# Altium PCB PCBdis.PcbDoc
Units mil, origin at the board's own origin, x right, y up, seen from the top; angles counter-clockwise.
Board outline 3600 x 2490 mil, 2 copper layers (Top Layer, Bottom Layer); 21 components, 32 nets, 153 pads, 28 vias.
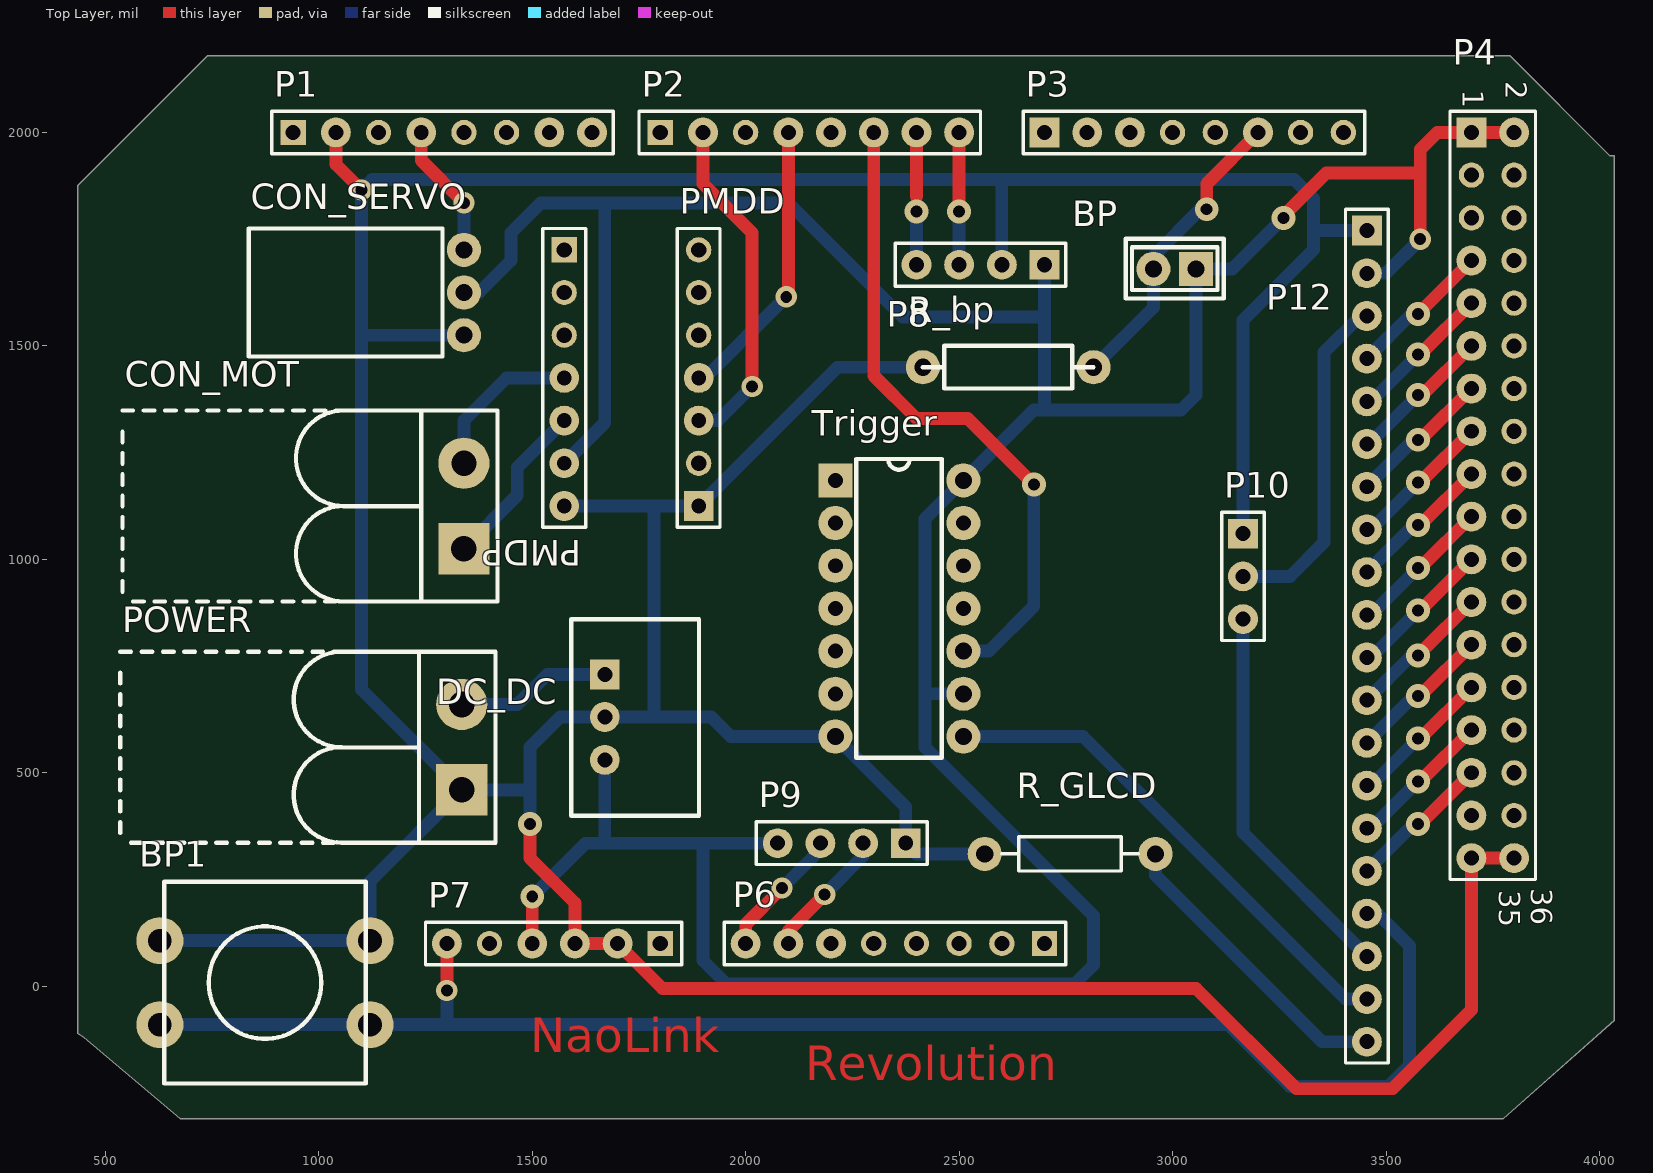
[diagram p0: Top Layer view]
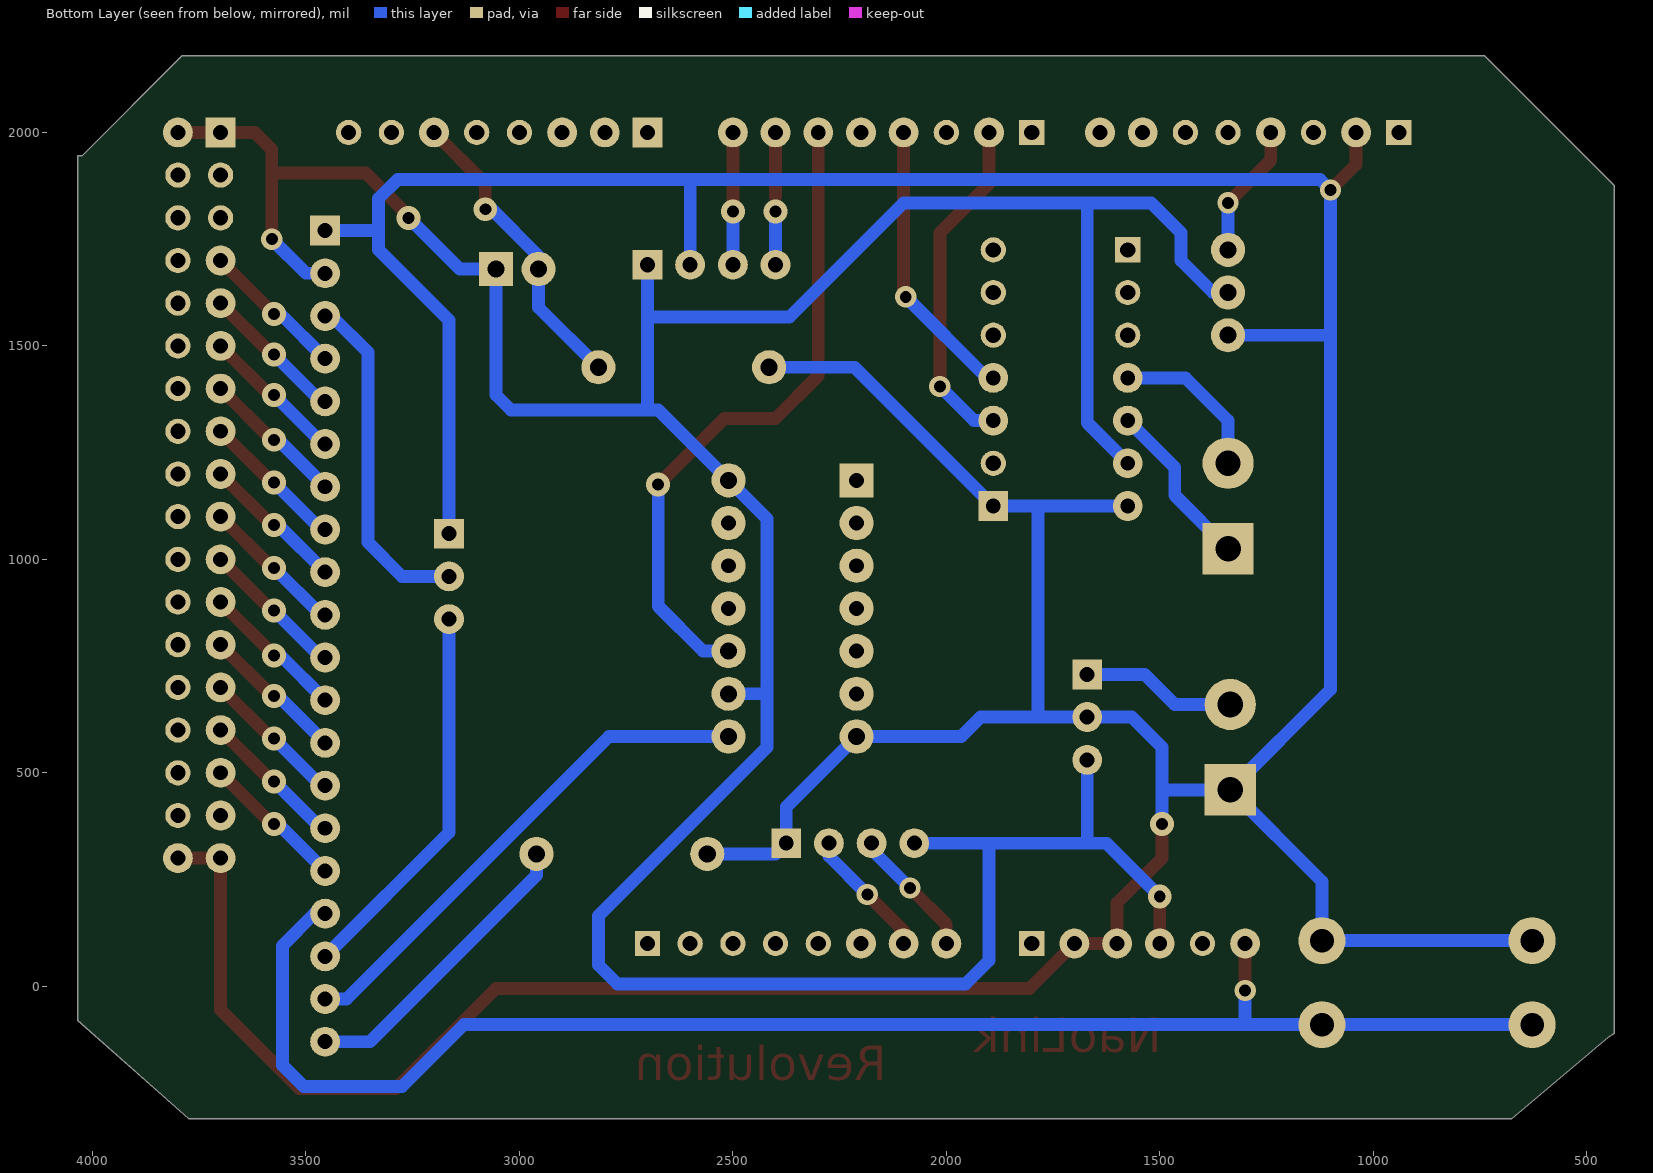
[diagram p1: Bottom Layer view, seen from below]

## Layer stack, top to bottom
Top Solder: solder mask 0.4, Solder Resist, Dk 3.5
Top Layer: signal copper 1.4
Dielectric1: dielectric 12.6, FR-4, Dk 4.8
Bottom Layer: signal copper 1.4
Bottom Solder: solder mask 0.4, Solder Resist, Dk 3.5

## Board outline
740,2180 435,1875 435,-110 450,-120 675,-310 3775,-310 4035,-80 4035,1945 4025,1945 3790,2180

## Design rules (kind name [scope] priority, off if disabled: settings)
Clearance Clearance_plan [InPolygon] p1: gap=20
Clearance Clearance_1 [All] p2: gap=10
PolygonConnect [All] p1: connectstyle=Relief reliefconductorwidth=10 reliefentries=4 polygonreliefangle="90 Angle" airgapwidth=10
RoomDefinition Sheet_distributeur [InNet('No Net')] p1: confinementstyle=ConfineIn formatcopy=TRUE lockcomponents=FALSE outline 450,-560 630,-560 630,-645 450,-645
RoutingVias [All] p1: holewidth=28 width=50 viastyle="Through Hole" minholewidth=28 minwidth=50 maxholewidth=28 maxwidth=50
SilkToSolderMaskClearance SilkscreenOverComponentPads [IsPad] p1: minsilkscreentomaskgap=10 clearancetoexposedcopper=TRUE
SolderMaskExpansion [All] p1: expansion=4
Width [All] p1: maxlimit=30 minlimit=10 preferedwidth=30 minimp=50.000000 maximp=50.000000 favimp=50.000000
28 further rules are at their usual default settings.

## Components (designator, comment, footprint, x,y, rotation, side; value= is the part's Value field where it differs from the comment)
BP "Connecteur bipastille" Conn_SIG_2pts 3055,1680 r0 top
BP1 "BP" BP_1 1120,-90 r0 top
CON_MOT "Alim" "Miniconnect 2pts"#1 1340,1025 r180 top
CON_SERVO "Connecteur Autocom 3pts" "Autocom HE14 - 3 - Coudé" 1340,1725 r180 top
DC_DC "TSR 1-2450" TSR-1 1670,730 r270 top
P1 "con_pwm_8_13" HDR1X8#1 940,2000 r0 top
P2 "con_pwm_0_7" HDR1X8#2 1800,2000 r0 top
P3 "con_comm_14_21" HDR1X8#3 2700,2000 r0 top
P4 "con_digital" HDR2X18 3700,2000 r270 top
P6 "con_analog_0_7" HDR1X8#4 2700,100 r180 top
P7 "con_power" HDR1X6 1800,100 r180 top
P8 "CON_BT" HDR1X4#1 2700,1690 r180 top
P9 "CON_JAUGE" HDR1X4#2 2375,335 r180 top
P10 "pot_lcd" HDR1X3 3165,1060 r270 top
P12 "CON_GLCD" HDR1X20 3455,1770 r270 top
PMDD "MOTOR_DRIVER_DATA" HDR1X7#1 1890,1125 r90 top
PMDP "MOTOR_DRIVER_POWER" HDR1X7#2 1575,1725 r270 top
POWER "Alim" "Miniconnect 2pts"#2 1335,460 r180 top
R_bp "1K" Axial_4 2815,1450 r180 top
R_GLCD "220" AXIAL-0.4 2760,310 r0 top
Trigger "74HC126" DIP_14 2210,1185 r0 top

## Footprints (in the part's own frame and the unit in brackets; to place one, negate y for a bottom-side part, rotate by r counter-clockwise, add the part's x,y. Pads: shape width x height; smd on the part's side, far side on the other; paste and mask are expansions set on the pad)
"Autocom HE14 - 3 - Coudé" [mil] "Connecteur 3 points Autocom série HE14, coudé"
  round 80 hole 40: 1(0,0) 2(0,100) 3(0,200)
  silkscreen extent 50,-50 504,250, body extent -13,-50 503,250, height 313
AXIAL-0.4 [mil] "Axial Device, Thru-Hole; 2 Leads; 0.4 in Pin Spacing"
  round 80 hole 40: 1(-200,0) 2(200,0)
  silkscreen extent -160,-40 160,40
Axial_4 [mil] "Résistance 1/4 ou 1/2 Watt"
  round 80 hole 40: 1(0,0) 2(400,0)
  silkscreen extent 0,-50 400,50, body extent -12,-45 412,46, height 116
BP_1 [mm] "Bouton poussoir 12mm Trous traversant"
  round 2.8 hole 1.4: 1(-12.5,0) 1(0,0) 2(-12.5,5) 2(0,5)
  silkscreen extent -12.25,-3.5 -0.25,8.5, body extent -13,-3.5 0.5,8.5, height 7.5
Conn_SIG_2pts [mil] "connecteur pour composants déportés faible puissance"
  rect 80x80 hole 40: 1(0,0)
  round 80 hole 40: 2(-100,0)
  silkscreen extent -165,-69 65,71
DIP_14 [mil]
  rect 80x80 hole 35: 1(0,0)
  round 80 hole 35: 2(0,-100) 3(0,-200) 4(0,-300) 5(0,-400) 6(0,-500) 11(300,-300) 12(300,-200) 13(300,-100)
  round 80 hole 40: 7(0,-600) 8(300,-600) 9(300,-500) 10(300,-400) 14(300,0)
  silkscreen extent 49,-650 249,50
HDR1X3 [mil] "Connector; Header; 3 Position"
  rect 70x70 hole 35: 1(0,0)
  round 70 hole 35.43: 2(100,0) 3(200,0)
  silkscreen extent -50,-50 250,50
HDR1X4#1 [mil] "Connector; Header; 4 Position"
  rect 70x70 hole 35.43: 1(0,0)
  round 70 hole 35.43: 2(100,0) 3(200,0) 4(300,0)
  silkscreen extent -50,-50 350,50
HDR1X4#2 [mil] "Connector; Header; 4 Position"
  rect 70x70 hole 35: 1(0,0)
  round 70 hole 35: 2(100,0) 3(200,0) 4(300,0)
  silkscreen extent -50,-50 350,50
HDR1X6 [mil] "Connector; Header; 6 Position"
  rect 59.06x59.06 hole 35.43: 1(0,0)
  round 70 hole 35: 2(100,0) 3(200,0) 4(300,0) 6(500,0)
  round 59.06 hole 35.43: 5(400,0)
  silkscreen extent -50,-50 550,50
HDR1X7#1 [mm] "Connector; Header; 7 Position"
  rect 1.778x1.778 hole 0.889: 1(0,0)
  round 1.5 hole 0.9: 2(2.54,0) 5(10.16,0) 6(12.7,0) 7(15.24,0)
  round 1.778 hole 0.889: 3(5.08,0) 4(7.62,0)
  silkscreen extent -1.27,-1.27 16.51,1.27
HDR1X7#2 [mm] "Connector; Header; 7 Position"
  rect 1.5x1.5 hole 0.9: 1(0,0)
  round 1.5 hole 0.9: 2(2.54,0) 3(5.08,0)
  round 1.778 hole 0.889: 4(7.62,0) 5(10.16,0) 6(12.7,0) 7(15.24,0)
  silkscreen extent -1.27,-1.27 16.51,1.27
HDR1X8#1 [mil] "Connector; Header; 8 Position"
  rect 59.06x59.06 hole 35.43: 1(0,0)
  round 70 hole 35: 2(100,0) 4(300,0) 7(600,0) 8(700,0)
  round 59.06 hole 35.43: 3(200,0) 5(400,0) 6(500,0)
  silkscreen extent -50,-50 750,50
HDR1X8#2 [mil] "Connector; Header; 8 Position"
  rect 59.06x59.06 hole 35.43: 1(0,0)
  round 70 hole 35: 2(100,0) 4(300,0) 6(500,0) 7(600,0) 8(700,0)
  round 59.06 hole 35.43: 3(200,0)
  round 70 hole 35.43: 5(400,0)
  silkscreen extent -50,-50 750,50
HDR1X8#3 [mil] "Connector; Header; 8 Position"
  rect 70x70 hole 35: 1(0,0)
  round 70 hole 35: 2(100,0) 3(200,0) 6(500,0)
  round 59.06 hole 35.43: 4(300,0) 5(400,0) 7(600,0) 8(700,0)
  silkscreen extent -50,-50 750,50
HDR1X8#4 [mil] "Connector; Header; 8 Position"
  rect 59.06x59.06 hole 35.43: 1(0,0)
  round 59.06 hole 35.43: 2(100,0) 3(200,0) 4(300,0) 5(400,0)
  round 70 hole 35: 6(500,0) 7(600,0) 8(700,0)
  silkscreen extent -50,-50 750,50
HDR1X20 [mil] "Connector; Header; 20 Position"
  rect 70x70 hole 35: 1(0,0)
  round 70 hole 35: 2(100,0) 3(200,0) 4(300,0) 5(400,0) 6(500,0) 7(600,0) 8(700,0) 9(800,0) 10(900,0) 11(1000,0) 12(1100,0) 13(1200,0) 14(1300,0) 15(1400,0) 16(1500,0) 17(1600,0) 18(1700,0) 19(1800,0) 20(1900,0)
  silkscreen extent -50,-50 1950,50
HDR2X18 [mil] "Connector; Header; 18x2 Position"
  rect 70x70 hole 35: 1(0,0)
  round 70 hole 35: 2(0,100) 7(300,0) 9(400,0) 11(500,0) 13(600,0) 15(700,0) 17(800,0) 19(900,0) 21(1000,0) 23(1100,0) 25(1200,0) 27(1300,0) 29(1400,0) 31(1500,0) 33(1600,0) 35(1700,0) 36(1700,100)
  round 59.06 hole 35.43: 3(100,0) 4(100,100) 5(200,0) 6(200,100) 8(300,100) 10(400,100) 12(500,100) 14(600,100) 16(700,100) 18(800,100) 20(900,100) 22(1000,100) 24(1100,100) 26(1200,100) 28(1300,100) 30(1400,100) 32(1500,100) 34(1600,100)
  silkscreen extent -50,-50 1750,150
"Miniconnect 2pts"#1 [mil] "Connecteur Entrelec Miniconnect 2 points"
  rect 120x120 hole 60: 1(0,0)
  round 120 hole 59.06: 2(0,-200)
  silkscreen extent -79,-324 800,124, body extent -79,-339 394,140, height 339
"Miniconnect 2pts"#2 [mil] "Connecteur Entrelec Miniconnect 2 points"
  rect 120x120 hole 60: 1(0,0)
  round 120 hole 60: 2(0,-200)
  silkscreen extent -79,-324 800,124, body extent -79,-339 394,140, height 339
TSR-1 [mil] "DC/DC Converters  TSR-1 Series - Footprint"
  rect 70x70 hole 35: 1(0,0)
  round 70 hole 35: 2(99.41,0) 3(199.8,0)
  silkscreen extent -130,-79 331,220, body extent -131,-78 330,221, height 402

## Part data
BP: "Double pastilles pour souder un moteur"
BP1: "Bouton poussoir pour CI"
CON_MOT POWER: library part "Connecteur Alimentation", "Connecteur d'alimentation"
CON_SERVO: library part "Connecteur Autocom 3 pts", "connecteur autocom HE14 3 pts"
DC_DC: "DC/DC Converters  TSR-1 Series, 1 A"
P1 P2 P3 P6: library part "Header 8", "Header, 8-Pin"
P4: library part "Header 18X2", "Header, 18-Pin, Dual row"
P7: library part "Header 6", "Header, 6-Pin"
P8 P9: library part "Header 4", "Header, 4-Pin"
P10: library part "Header 3", "Header, 3-Pin"
P12: library part "Header 20", "Header, 20-Pin"
PMDD PMDP: library part "Header 7", "Header, 7-Pin"
R_bp: library part Res, "Resistance"
R_GLCD: library part Res2, "Resistor"
Trigger: library part 74XX126, "Quad Buffer/line driver; 3-state"

## Via types
v1: diameter 56, hole 28, Top Layer to Bottom Layer, 20 vias
v2: diameter 50, hole 28, Top Layer to Bottom Layer, 8 vias

## Nets (pads, with @x,y where several pads share a name; then routed paths per layer and width w, separated by ;. In a path a pad name is that pad's centre, name@x,y a point inside that pad or via, vN(x,y) a via of type N, cw(c..) or ccw(c..) an arc to the next point about the centre after c; other vN are vias at no path point)
12V: DC_DC.1 POWER.2 | length 364
  Bottom Layer w30: POWER.2 1465,660 1535,730 DC_DC.1
A: P12.19 Trigger.8 | length 1199.7
  Bottom Layer w30: Trigger.8 2790,585 3405,-30 P12.19
CS1: P4.29 P12.15 | length 328.2
  Top Layer w30: v1@3585,485 P4.29
  Bottom Layer w30: P12.15 3465,370 v1(3575,480)
CS2: P4.31 P12.16 | length 328.2
  Top Layer w30: v1@3585,385 P4.31
  Bottom Layer w30: P12.16 3565,380 v1(3575,380)
DB0: P4.13 P12.7 | length 328.2
  Top Layer w30: v1@3585,1285 P4.13
  Bottom Layer w30: P12.7 3565,1280 v1(3575,1280)
DB1: P4.15 P12.8 | length 328.2
  Top Layer w30: v1@3585,1185 P4.15
  Bottom Layer w30: P12.8 3465,1070 v1(3575,1180)
DB2: P4.17 P12.9 | length 328.2
  Top Layer w30: v1@3585,1085 P4.17
  Bottom Layer w30: P12.9 3565,1080 v1(3575,1080)
DB3: P4.19 P12.10 | length 328.2
  Top Layer w30: v1@3585,985 P4.19
  Bottom Layer w30: P12.10 3465,870 v1(3575,980)
DB4: P4.21 P12.11 | length 328.2
  Top Layer w30: v1@3585,885 P4.21
  Bottom Layer w30: P12.11 3465,770 v1(3575,880)
DB5: P4.23 P12.12 | length 326.1
  Top Layer w30: v1@3585,785 P4.23
  Bottom Layer w30: P12.12 3560,775 v1(3575,775)
DB6: P4.25 P12.13 | length 328.2
  Top Layer w30: v1@3585,685 P4.25
  Bottom Layer w30: P12.13 3565,680 v1(3575,680)
DB7: P4.27 P12.14 | length 328.2
  Top Layer w30: v1@3585,585 P4.27
  Bottom Layer w30: P12.14 3465,470 v1(3575,580)
DT: P6.8 P9.3 | length 307.5
  Top Layer w30: P6.8 2000,145 v2(2085,230)
  Bottom Layer w30: v2(2085,230) 2175,320 P9.3
E_EN: P4.11 P12.6 | length 330.3
  Top Layer w30: v1@3585,1385 P4.11
  Bottom Layer w30: P12.6 3460,1270 v1(3575,1385)
GND: BP1.2 CON_SERVO.3 DC_DC.2 P1.2 P4.35 P4.36 P7.2 P7.3 P8.2 P9.1 P10.1 P12.1 PMDD.1 PMDP.7 POWER.1 R_bp.2 R_GLCD.1 Trigger.7 | length 12457.7
  Top Layer w30: P1.2 1040,1925 v2(1100,1865) ; v1(1495,380) 1495,300 1600,195 P7.3 P7.2 1805,-5 3055,-5 3290,-240 3515,-240 3700,-55 P4.35 P4.36
  Bottom Layer w30: BP1.2@627.87,106.85 1120,106.85 1120,245 POWER.1 ; CON_SERVO.3 1100,1525 ; v1(1495,380) 1495,460 ; PMDP.7 1785,1125 ; R_bp.2 2215,1450 PMDD.1 1785,1125 ; R_GLCD.1 2400,310 P9.1 2375,420 Trigger.7 1965,585 1919.41,630.59 1790,630.59 ; P8.2 2600,1890 ; P10.1 3165,1560 3330,1725 3330,1770 ; P12.1 3330,1770 ; 1100,1525 v2(1100,1865) 1125,1890 2600,1890 ; 1100,1525 1100,695 POWER.1 ; POWER.1 1495,460 ; 1495,460 1495,560 1565.59,630.59 DC_DC.2 1790,630.59 ; 1785,1125 1785,635.59 1790,630.59 ; 2600,1890 3285,1890 3330,1845 3330,1770
NetCON_MOT_1: CON_MOT.1 PMDP.5 | length 397.3
  Bottom Layer w30: CON_MOT.1 1465,1150 1465,1215 PMDP.5
NetCON_MOT_2: CON_MOT.2 PMDP.4 | length 376.4
  Bottom Layer w30: CON_MOT.2 1340,1325 1440,1425 PMDP.4
NetP12_20: P12.20 R_GLCD.2 | length 706.5
  Bottom Layer w30: R_GLCD.2 2960,260 3350,-130 P12.20
PWM_MOT_1: P2.2 PMDD.3 | length 800.8
  Top Layer w30: P2.2 1900,1880 2015,1765 v2(2015,1405)
  Bottom Layer w30: PMDD.3 1935,1325 v2(2015,1405)
PWM_MOT_2: P2.4 PMDD.4 | length 670.8
  Top Layer w30: v2(2095,1615) 2100,1620 P2.4
  Bottom Layer w30: PMDD.4 1905,1425 v2(2095,1615)
PWM_SERVO: CON_SERVO.1 P1.4 | length 316.4
  Top Layer w30: P1.4 1240,1935 v2(1340,1835)
  Bottom Layer w30: CON_SERVO.1 v2(1340,1835)
R/W: P4.9 P12.5 | length 333.2
  Top Layer w30: v1@3585,1485 P4.9 P4.9@3695,1600
  Bottom Layer w30: P12.5 3465,1370 v1(3575,1480)
RESET: BP1.1 P7.6 P12.17 | length 3606
  Top Layer w30: v2@1300,-5 P7.6
  Bottom Layer w30: BP1.1@627.87,-90 1120,-90 1305,-90 ; v2(1300,-10) 1300,-85 1305,-90 ; P12.17 3480,170 3555,95 3555,-185 3505,-235 3275,-235 3130,-90 1305,-90
RS: P4.7 P12.4 | length 340.3
  Top Layer w30: v1(3575,1575) P4.7
  Bottom Layer w30: P12.4 3560,1575 v1(3575,1575)
RXD: P2.8 P8.3 | length 310
  Top Layer w30: v1(2500,1815) P2.8
  Bottom Layer w30: P8.3 v1(2500,1815)
SCK: P6.7 P9.2 | length 307.5
  Top Layer w30: P6.7 2100,130 v2(2185,215)
  Bottom Layer w30: v2(2185,215) 2275,305 P9.2
SIG_BP: BP.2 P3.6 R_bp.1 | length 718.3
  Top Layer w30: v1(3080,1820) 3080,1880 P3.6
  Bottom Layer w30: R_bp.1 2955,1590 BP.2 2955,1710 3065,1820 v1(3080,1820)
TRIGGER_UC: P2.6 Trigger.10 | length 1544.1
  Top Layer w30: P2.6 2300,1430 2400,1330 2520,1330 v1(2675,1175)
  Bottom Layer w30: Trigger.10 2570,785 2675,890 v1(2675,1175)
TXD: P2.7 P8.4 | length 275
  Top Layer w30: 2400,1850 P2.7
  Bottom Layer w30: P8.4 v1(2400,1815)
V0: P10.2 P12.3 | length 803.3
  Bottom Layer w30: P10.2 3275,960 3355,1040 3355,1485 3440,1570 P12.3
VCC: BP.1 CON_SERVO.2 DC_DC.3 P4.1 P4.2 P7.4 P8.1 P9.4 P12.2 PMDP.6 Trigger.9 Trigger.14 | length 8329.4
  Top Layer w30: P7.4 v1(1500,210) ; v1@3255,1800 3360,1905 3580,1905 ; v2(3580,1750) 3580,1905 ; P4.2 P4.1 3620,2000 3580,1960 3580,1905
  Bottom Layer w30: CON_SERVO.2 1375,1625 1450,1700 1450,1765 1520,1835 1675,1835 ; v1(1500,210) 1625,335 1670,335 ; PMDP.6 1670,1320 1670,1830 1675,1835 ; DC_DC.3 1670,335 ; P9.4 1900,335 ; Trigger.9 2420,685 ; P8.1 2700,1567.5 ; v1(3260,1800) 3140,1680 BP.1 3055,1385 3020,1350 2705,1350 ; P12.2 3500,1670 v2(3580,1750) ; 1670,335 1900,335 ; 1675,1835 2100,1835 2367.5,1567.5 2700,1567.5 ; 1900,335 1900,60 1955,5 2770,5 2815,50 2815,165 2420,560 2420,685 ; 2420,685 2420,1095 Trigger.14 2675,1350 2705,1350 ; 2700,1567.5 2700,1355 2705,1350
VEE: P10.3 P12.18 | length 910.1
  Bottom Layer w30: P10.3 3165,360 P12.18
pads on no net: P1.1 P1.3 P1.5 P1.6 P1.7 P1.8 P2.1 P2.3 P2.5 P3.1 P3.2 P3.3 P3.4 P3.5 P3.7 P3.8 P4.3 P4.4 P4.5 P4.6 P4.8 P4.10 P4.12 P4.14 P4.16 P4.18 P4.20 P4.22 P4.24 P4.26 P4.28 P4.30 P4.32 P4.33 P4.34 P6.1 P6.2 P6.3 P6.4 P6.5 P6.6 P7.1 P7.5 PMDD.2 PMDD.5 PMDD.6 PMDD.7 PMDP.1 PMDP.2 PMDP.3 Trigger.1 Trigger.2 Trigger.3 Trigger.4 Trigger.5 Trigger.6 Trigger.11 Trigger.12 Trigger.13
copper on no net: | length 10
  Top Layer w30: 3700,390 3700,400

## Other copper
Top Layer:
  text "NaoLink" at 1495,-155 h80
  text "Revolution" at 2140,-220 h80
Multi-Layer:
  lines w10: -900,-100 -900,2300 -600,2600 4800,2600 5100,2300 5100,-100 4800,-400 -600,-400 -900,-100

## Text inside footprints (layer, text, board x,y; h text height)
P4: Top Overlay "2" at 3780,2120 h50 r270; Top Overlay "1" at 3680,2100 h50 r270; Top Overlay "35" at 3765,225 h50 r270; Top Overlay "36" at 3840,230 h50 r270